# Allegro board codec_board_newcaps.brd
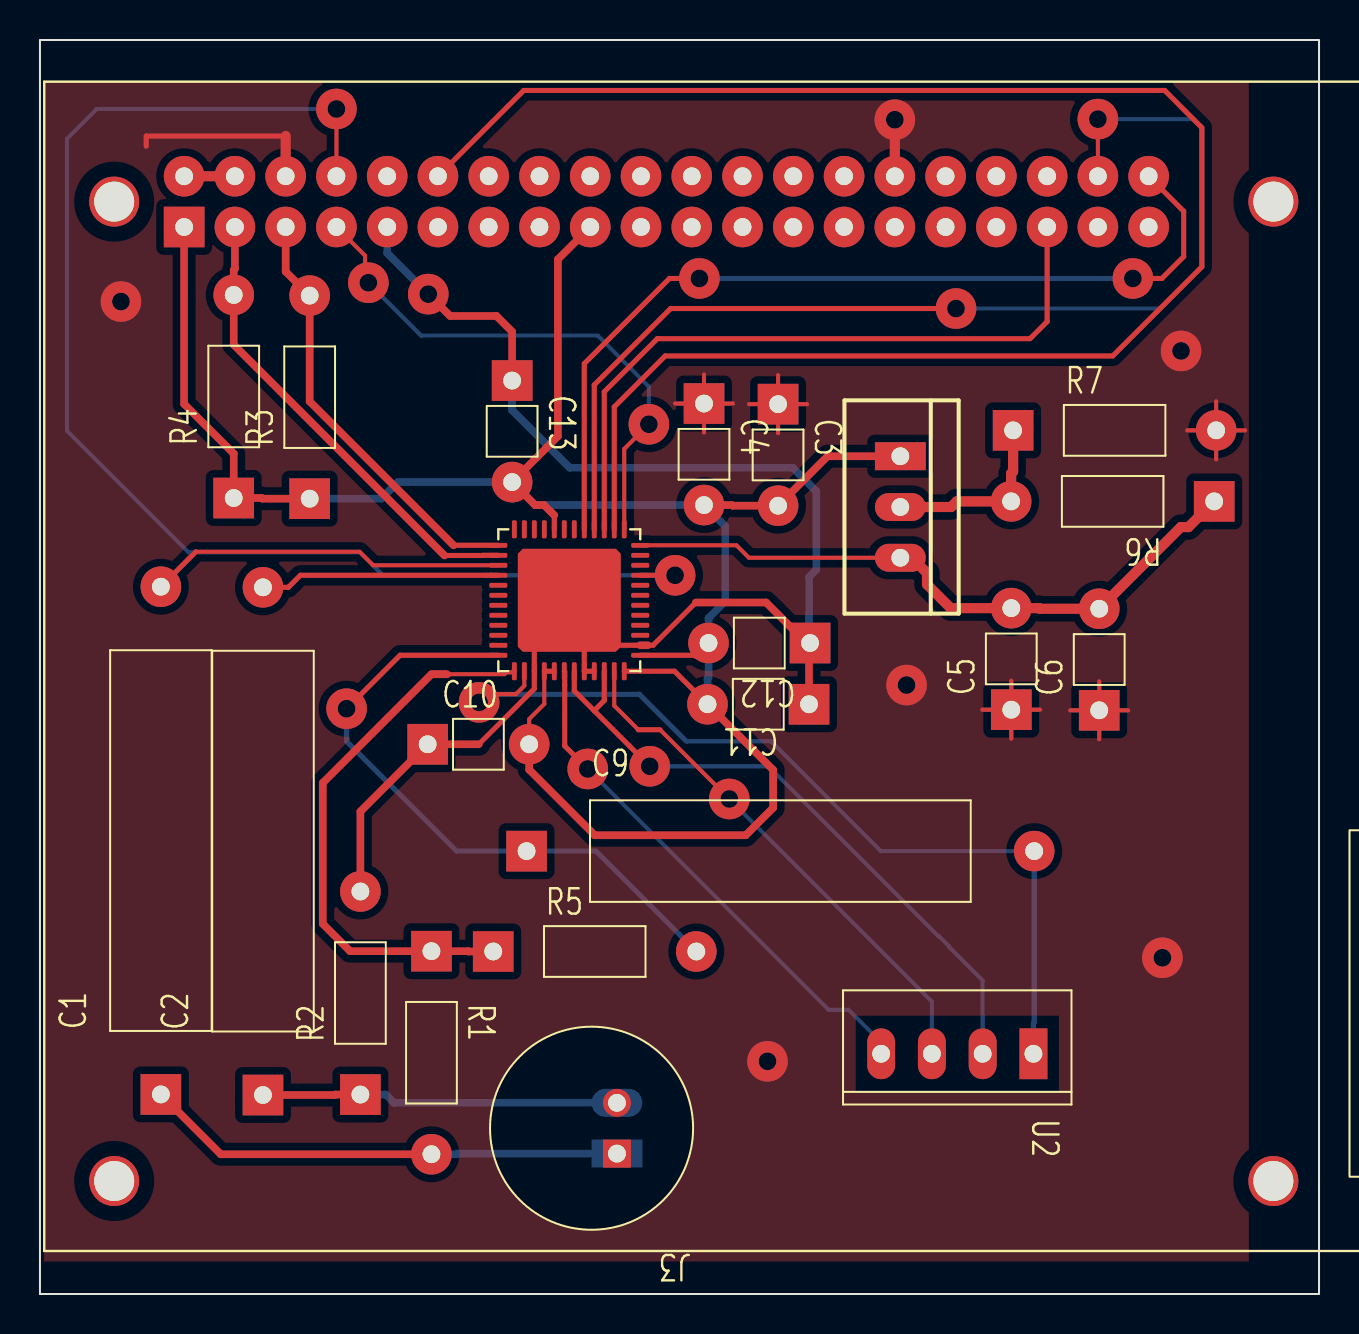
[diagram p0: board, top side]
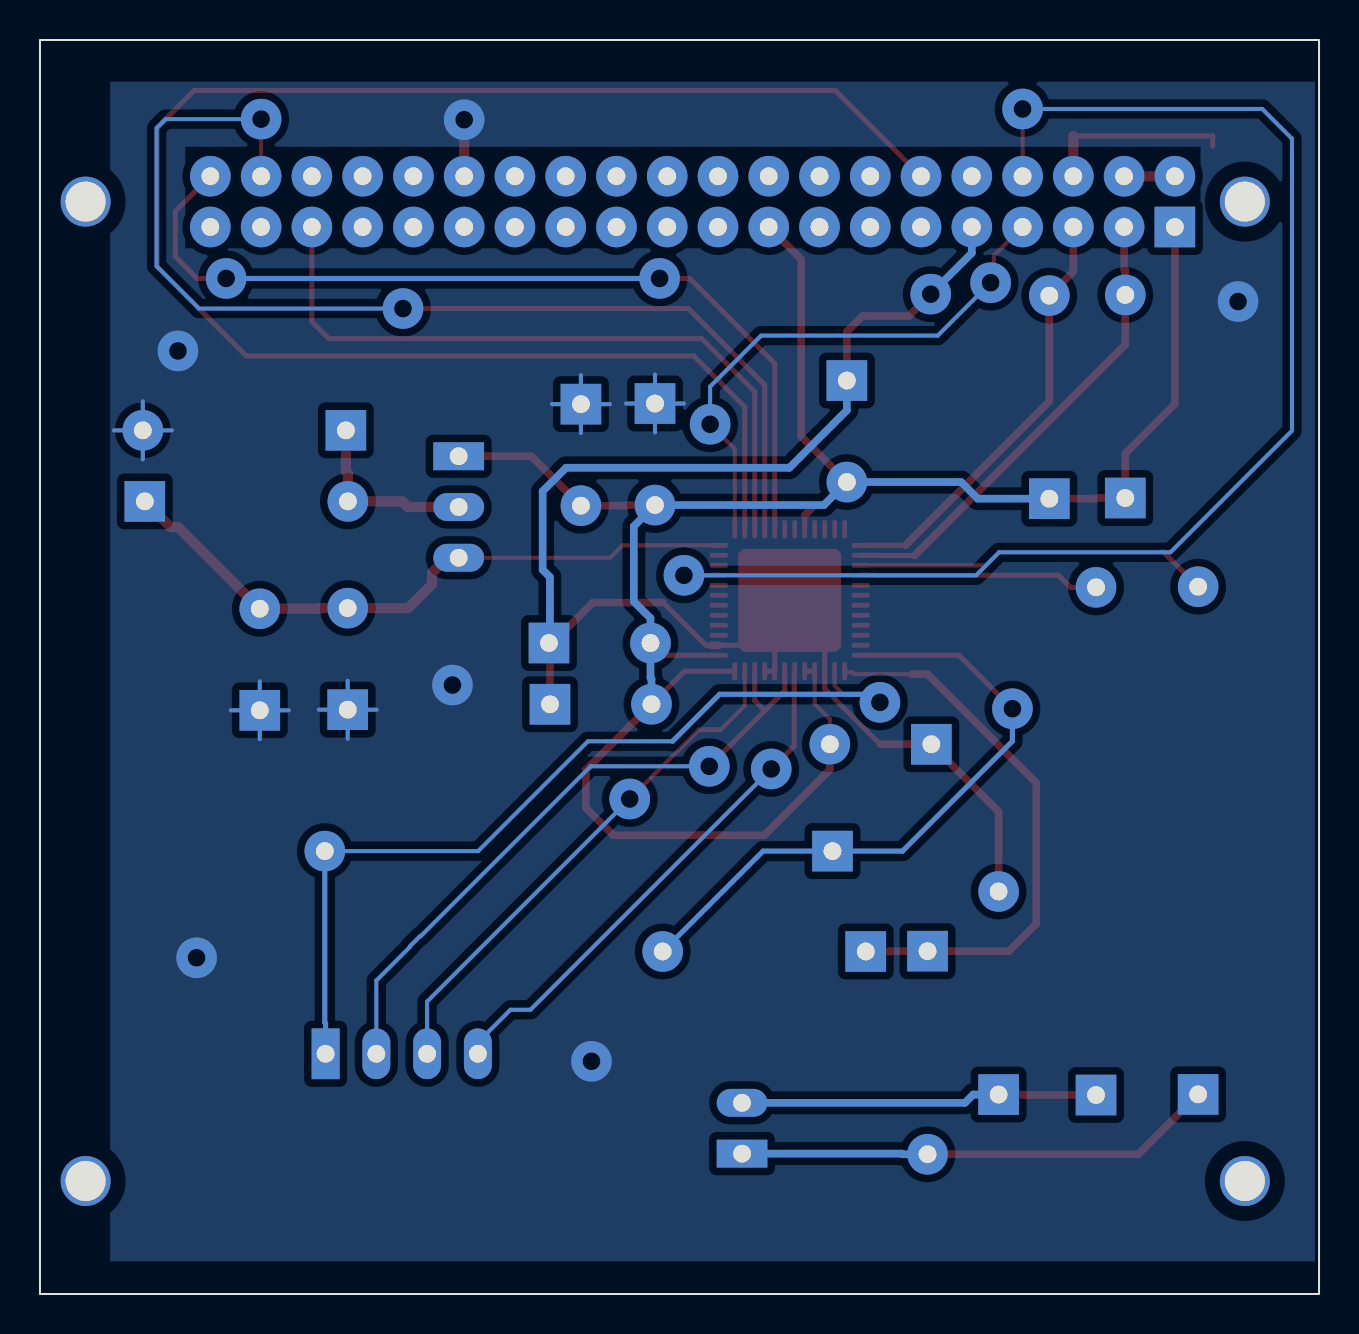
[diagram p1: board, bottom side, seen from below]

Outline 64 x 62.74 mm; copper layers: TOP, BOTTOM. Coordinates in mm from the lower left corner of the outline.
Outline path: rectangle 0,0 64,62.74

## Design rules (mm)
constraint set DEFAULT: min track width 0.203, pair gap 0.203

## Placement (name value [footprint] x y rotation side)
C1  0.47uF  [GU-RC1000]  6.05 9.99 90 top
C2  0.47uF  [GU-RC1000]  11.16 9.96 90 top
C3  1uF  [GU-RC200]  36.93 44.52 270 top
C4  1uF  [GU-RC200]  33.23 44.55 270 top
C5  1uF  [GU-RC200]  48.6 29.24 90 top
C6  1uF  [GU-RC200]  53 29.2 90 top
C9  0.47uF  [GU-RC1000]  24.35 22.16 0 top
C10  1uF  [GU-RC200]  19.4 27.51 0 top
C11  1uF  [GU-RC200]  38.48 29.51 180 top
C12  1uF  [GU-RC200]  38.53 32.57 180 top
C13  1uF  [GU-RC200]  23.62 45.7 270 top
J1  TLV320AIC33  [QFN49P50_700X700X100L40X24T515]  26.48 34.71 270 top
J3  Mic  [GU-MIC100]  28.87 7.03 180 top
R1  1k  [GU-RC400]  19.59 17.15 270 top
R2  1k  [GU-RC400]  16.03 9.98 90 top
R3  10k  [GU-RC400]  13.5 39.79 90 top
R4  10k  [GU-RC400]  9.7 39.82 90 top
R5  2k  [GU-RC400]  22.68 17.14 0 top
R6  1k  [GU-RC400]  58.75 39.66 180 top
R7  1k  [GU-RC400]  48.69 43.21 0 top
U1  Raspberry Pi B+  [GU-RASP-PI-3]  0.21 2.15 0 top
U2  Aux Out  [GU-MOLEX4]  49.71 12.02 270 top
U4  LM317_H  [GU-TO220AB]  43.05 41.92 270 top

## Library data of the parts
C1-C6 C9-C13 = CAP NP
J1 = CON50A_2
J3 = CON2
R1-R7 = RESISTOR
U1 = Raspberry Pi B+_0
U2 = 2MMCONN4
U4 = LM317_H

## Footprints (pads in the part's own frame, mm; a bottom-side part is the same pattern mirrored in y, then rotated)
GU-MIC100
  rect 1.397x1.397 hole 0.889: 1(0,0)
  round 1.397 hole 0.889: 2(0,-2.54)
GU-MOLEX4
  rect 2.54x1.397 hole 0.889: 1(0,0)
  oval 2.54x1.397 hole 0.889: 2(0,-2.54) 3(0,-5.08) 4(0,-7.62)
GU-RASP-PI-3
  round 2.5 hole 2 unplated: (3.5,52.5) (3.5,3.5) (61.5,52.5) (61.5,3.5)
  rect 2.032x2.032 hole 0.889: 1(7,51.23)
  round 2.032 hole 0.889: 2(7,53.77) 3(9.54,51.23) 4(9.54,53.77) 5(12.08,51.23) 6(12.08,53.77) 7(14.62,51.23) 8(14.62,53.77) 9(17.16,51.23) 10(17.16,53.77) 11(19.7,51.23) 12(19.7,53.77) 13(22.24,51.23) 14(22.24,53.77) 15(24.78,51.23) 16(24.78,53.77) 17(27.32,51.23) 18(27.32,53.77) 19(29.86,51.23) 20(29.86,53.77) 21(32.4,51.23) 22(32.4,53.77) 23(34.94,51.23) 24(34.94,53.77) 25(37.48,51.23) 26(37.48,53.77) 27(40.02,51.23) 28(40.02,53.77) 29(42.56,51.23) 30(42.56,53.77) 31(45.1,51.23) 32(45.1,53.77) 33(47.64,51.23) 34(47.64,53.77) 35(50.18,51.23) 36(50.18,53.77) 37(52.72,51.23) 38(52.72,53.77) 39(55.26,51.23) 40(55.26,53.77)
GU-RC200
  rect 2.032x2.032 hole 0.889: 1(0,0)
  round 2.032 hole 0.889: 2(5.08,0)
GU-RC400
  rect 2.032x2.032 hole 0.889: 1(0,0)
  round 2.032 hole 0.889: 2(10.16,0)
GU-RC1000
  rect 2.032x2.032 hole 0.889: 1(0,0)
  round 2.032 hole 0.889: 2(25.4,0)
GU-TO220AB
  rect 1.397x2.54 hole 0.889: 1(0,0)
  oval 1.397x2.54 hole 0.889: 2(2.54,0) 3(5.08,0)
QFN49P50_700X700X100L40X24T515
  rrect 0.24x0.9 smd: 1(-2.75,-3.55) 2(-2.25,-3.55) 3(-1.75,-3.55) 4(-1.25,-3.55) 5(-0.75,-3.55) 6(-0.25,-3.55) 7(0.25,-3.55) 8(0.75,-3.55) 9(1.25,-3.55) 10(1.75,-3.55) 11(2.25,-3.55) 12(2.75,-3.55) 25(2.75,3.55) 26(2.25,3.55) 27(1.75,3.55) 28(1.25,3.55) 29(0.75,3.55) 30(0.25,3.55) 31(-0.25,3.55) 32(-0.75,3.55) 33(-1.25,3.55) 34(-1.75,3.55) 35(-2.25,3.55) 36(-2.75,3.55)
  rrect 0.9x0.24 smd: 13(3.55,-2.75) 14(3.55,-2.25) 15(3.55,-1.75) 16(3.55,-1.25) 17(3.55,-0.75) 18(3.55,-0.25) 19(3.55,0.25) 20(3.55,0.75) 21(3.55,1.25) 22(3.55,1.75) 23(3.55,2.25) 24(3.55,2.75) 37(-3.55,2.75) 38(-3.55,2.25) 39(-3.55,1.75) 40(-3.55,1.25) 41(-3.55,0.75) 42(-3.55,0.25) 43(-3.55,-0.25) 44(-3.55,-0.75) 45(-3.55,-1.25) 46(-3.55,-1.75) 47(-3.55,-2.25) 48(-3.55,-2.75)
  rrect 5.15x5.15 smd: 49(0,0)

## Nets
1.9V: C5.2 C6.2 J1.36 R6.1 U4.3(OUT)
3V3: C3.2 C4.2 C10.2 C11.2 C12.2 C13.2 J1.16 J1.17 J1.24 J1.25 J1.44 R3.1 R4.1 U1.1 U1.17 U4.1
5V: U1.2 U1.4(P5V#4)
AGND: C10.1 C11.1 C12.1 C13.1 J1.15 J1.20 J1.21 J1.26 J1.49 R2.2 U1.9 U1.25 U1.34 U1.39
DGND: C3.1 C4.1 C5.1 C6.1 J1.42 J1.43 R7.2 U1.6 U1.14 U1.20 U1.30
/RESET: J1.33 U1.8
BCLK: J1.38 U1.12
DIN: J1.40 U1.38
DOUT: J1.41 U1.40
HPCOM: J1.19 J1.22 U2.2
HPLOUT: J1.18 U2.4
HPROUT: J1.23 U2.3
LINE1LM: C2.2 J1.4
LINE1LP: C1.2 J1.3
MCLK: J1.37 U1.7
MIC3R: C9.2 J1.14 U2.1
MICBIAS: J1.13 R1.1 R5.1
MICDET: C9.1 J1.12 R5.2
SCL: J1.1 R3.2 U1.5
SDA: J1.2 R4.2 U1.3
WCLK: J1.39 U1.35
N00434: C1.1 J3.1 R1.2
N00441: C2.1 J3.2 R2.1
N13170: R6.2 R7.1 U4.2

Pads without a net: J1 5 6 7 8 9 10 11 27 28 29 30 31 32 34 35 45 46 47 48; U1 10 11 13 15 16 18 19 21 22 23 24 26 27 28 29 31 32 33 36 37

## Via types
v1: diameter 2.032, hole 0.889, TOP to BOTTOM, 20 vias

## Routing (per net, layer and track width the routed paths; a pad name or vN(x,y) marks a point on that pad's centre or on a via; arc(x,y) is an arc through that point)
1.9V: length 32.6
  TOP w0.203: U4.3 35.47,36.84 34.85,37.46 J1.36
  TOP w0.508: R6.1 57.47,38.37 57.09,38.37 C6.2 50.03,34.28 50,34.32 C5.2 45.57,34.32 44.38,35.5 44.38,36.07 43.62,36.84 U4.3
3V3: length 113.4
  TOP w0.203: J1.16 25.23,29.52 24.48,28.77 C10.2
  TOP w0.254: C11.2 31.75,31.16 J1.24 ; J1.25 32.84,31.96 ; J1.17 J1.16 ; J1.44 25.73,38.96
  TOP w0.381: C11.2 36.69,26.22 36.69,24.33 35.31,22.95 27.76,22.95 24.48,26.24 C10.2 ; 25.73,38.96 25.22,39.47 24.78,39.47 C13.2 25.91,42.91 25.91,51.76 U1.17 ; U1.1 7.21,44.53 9.7,42.05 R4.1 11.09,39.82 11.13,39.79 R3.1 ; C4.2 34.62,39.47 34.65,39.44 C3.2 39.41,41.92 U4.1 ; 32.84,31.96 C12.2
  BOTTOM w0.381: R3.1 17.07,39.79 17.9,40.62 C13.2 24.78,39.47 C4.2 34.28,38.41 34.28,34.65 33.45,33.82 C12.2 33.45,30.83 33.4,30.78 C11.2
5V: length 2.5
  TOP w0.508: U1.2 U1.4
AGND: length 79.2
  TOP w0.254: 27.23,33.96 J1.20 J1.21 ; 24.73,32.96 J1.15 24.73,30.28 21.96,27.51 ; 32.81,34.59 30.68,32.46 30.41,32.46 ; J1.26 28.73,32.46
  TOP w0.381: C12.1 38.44,32.48 ; 38.44,32.48 36.33,34.59 32.81,34.59 ; 38.44,32.48 38.48,32.45 C11.1 ; 21.96,27.51 C10.1 16.03,24.14 R2.2 ; v1(19.43,50.03) 20.52,48.93 22.84,48.93 23.62,48.15 C13.1 ; 28.73,32.46 J1.49 24.73,32.96 ; J1.26 30.41,32.46
  BOTTOM w0.381: U1.9 17.37,52.08 v1(19.43,50.03) ; C12.1 38.48,32.62 38.48,35.87 38.85,36.24 38.85,40.17 37.67,41.34 26.5,41.34 23.62,44.21 C13.1
DGND: length 70.3
  TOP w0.203: 53,27.76 C6.1 ; C6.1 51.55,29.2 ; C6.1 53,30.65 ; C6.1 54.45,29.2 ; 58.85,41.76 R7.2 ; R7.2 58.85,44.66 ; R7.2 60.3,43.21 ; R7.2 57.4,43.21 ; C3.1 38.38,44.52 ; C3.1 36.93,43.07 ; C3.1 36.93,45.97 ; C3.1 35.48,44.52 ; 31.78,44.55 C4.1 ; C4.1 34.67,44.55 ; C4.1 33.23,43.1 ; C4.1 33.23,46 ; 48.6,27.79 C5.1 ; C5.1 48.6,30.68 ; C5.1 50.05,29.24 ; C5.1 47.15,29.24
  TOP w0.254: 5.32,57.42 5.32,57.93 12.29,57.93 ; v1(42.77,58.75) 42.85,58.75
  TOP w0.508: U1.6 12.29,57.93 ; U1.30 v1(42.77,58.75)
  BOTTOM w0.203: C3.1 38.38,44.52 ; C3.1 36.93,43.07 ; C3.1 36.93,45.97 ; C3.1 35.48,44.52 ; 48.6,27.79 C5.1 ; C5.1 47.15,29.24 ; C5.1 48.6,30.68 ; C5.1 50.05,29.24 ; C6.1 54.45,29.2 ; C6.1 53,27.76 ; C6.1 51.55,29.2 ; C6.1 53,30.65 ; 31.78,44.55 C4.1 ; C4.1 33.23,46 ; C4.1 33.23,43.1 ; C4.1 34.67,44.55 ; R7.2 58.85,44.66 ; R7.2 58.85,41.76 ; R7.2 57.4,43.21 ; R7.2 60.3,43.21
  vias: v1(4.05,49.65) v1(36.4,11.64) v1(43.36,30.47) v1(56.16,16.82) v1(57.09,47.18)
/RESET: length 67.2
  TOP w0.203: v1(14.83,59.29) U1.8
  TOP w0.254: J1.33 v1(31.78,35.96)
  BOTTOM w0.203: v1(31.78,35.96) 17.16,35.96 16.01,37.11 7.43,37.11 1.35,43.19 1.35,57.8 2.84,59.29 v1(14.83,59.29)
BCLK: length 86.2
  TOP w0.254: U1.12 24.21,60.22 56.28,60.22 58.13,58.36 58.13,51.39 53.68,46.93 31.29,46.93 28.73,44.38 J1.38
DIN: length 55.3
  TOP w0.203: v1(52.93,58.78) U1.38
  TOP w0.254: J1.40 27.73,45.48 31.55,49.3 v1(45.83,49.3)
  BOTTOM w0.203: v1(45.83,49.3) 56.04,49.3 58.16,51.43 58.16,58.32 57.71,58.78 v1(52.93,58.78)
DOUT: length 45.2
  TOP w0.254: U1.40 57.23,54.17 57.23,51.9 56.13,50.81 v1(54.68,50.81) ; v1(32.99,50.81) 31.5,50.81 27.23,46.55 J1.41
  BOTTOM w0.254: v1(32.99,50.81) v1(54.68,50.81)
HPCOM: length 33.3
  TOP w0.254: 27.73,29.18 28.23,29.69 J1.22 ; 27.73,29.18 v1(30.51,26.4) ; 27.73,29.18 26.73,30.18 J1.19
  BOTTOM w0.203: v1(30.51,26.4) 36.45,26.4 44.95,17.9 44.99,17.9 45.49,17.39 45.49,17.36 47.17,15.68 U2.2
HPLOUT: length 26.3
  TOP w0.254: v1(27.41,26.27) 26.26,27.42 26.26,30.46 26.26,30.92 26.26,31.14 J1.18
  BOTTOM w0.203: v1(27.41,26.27) 39.46,14.22 40.46,14.22 42.09,12.59 U2.4
HPROUT: length 26.4
  TOP w0.203: J1.23 28.73,29.44 29.94,28.23 ; v1(34.49,24.77) 31.03,28.23
  TOP w0.254: 31.03,28.23 29.94,28.23
  BOTTOM w0.203: v1(34.49,24.77) 44.63,14.63 U2.3
LINE1LM: length 12
  TOP w0.254: C2.2 12.43,35.36 13.03,35.96 22.33,35.96 22.56,35.96 J1.4
LINE1LP: length 17.9
  TOP w0.203: 7.8,37.13 16,37.13 16.67,36.46 J1.3
  TOP w0.254: 7.8,37.13 C1.2
MCLK: length 27.3
  TOP w0.203: U1.7 16.27,51.95 16.27,50.76 v1(16.43,50.6) ; J1.37 29.23,42.28 v1(30.47,43.52)
  BOTTOM w0.203: v1(16.43,50.6) 19.08,47.95 27.92,47.95 30.47,45.4 v1(30.47,43.52)
MIC3R: length 44.7
  TOP w0.203: J1.14 24.23,30.43 23.82,30.01 22.38,30.01 v1(21.97,29.6)
  BOTTOM w0.203: C9.2 42.08,22.16 36.58,27.65 32.35,27.65
  BOTTOM w0.254: 32.35,27.65 29.99,30.01 22.37,30.01 v1(21.97,29.6) ; C9.2 49.75,13.58 49.71,13.54 U2.1
MICBIAS: length 28.7
  TOP w0.203: 23.71,31.16 23.65,31.1 23.33,31.1 23.25,31.01 20.37,31.01
  TOP w0.254: 19.72,31.07 20.31,31.07 20.37,31.01 ; 23.71,31.16 J1.13
  TOP w0.381: 20.37,31.01 19.58,31.01 14.15,25.57 14.15,18.52 15.52,17.15 R1.1 21.42,17.15 21.44,17.14 R5.1
MICDET: length 32.5
  TOP w0.254: J1.12 18.02,31.96 v1(15.34,29.28)
  BOTTOM w0.254: R5.2 27.82,22.16 C9.1 ; C9.1 20.84,22.16 15.34,27.66 v1(15.34,29.28) ; C9.1 24.12,21.93
SCL: length 21.6
  TOP w0.254: J1.1 20.69,37.46
  TOP w0.381: 20.69,37.46 13.5,44.66 R3.2 12.29,51.15 U1.5
SDA: length 23.5
  TOP w0.254: J1.2 22.18,36.96 22.17,36.95 20.24,36.95
  TOP w0.381: U1.3 9.75,51.29 9.7,51.23 R4.2 9.7,47.5 20.24,36.95
WCLK: length 35.2
  TOP w0.254: U1.35 50.39,48.65 49.54,47.8 30.89,47.8 28.23,45.14 J1.39
N00434: length 24.1
  TOP w0.381: C1.1 9.04,6.99 R1.2
  BOTTOM w0.381: J3.1 20.89,7.03 20.86,6.99 R1.2
N00441: length 17.9
  TOP w0.381: R2.1 14.76,9.98 14.74,9.96 C2.1
  BOTTOM w0.381: R2.1 17.3,9.98 17.72,9.57 J3.2
N13170: length 9.3
  TOP w0.508: U4.2 45.59,39.38 45.87,39.66 R6.2 48.59,41.05 48.69,41.15 R7.1

## Copper pours and planes (outline as drawn; the poured copper is in the pictures)
DGND on TOP: 0.2,60.66 60.48,60.66 60.48,1.63 0.2,1.63 ; 33 cut-outs
DGND on BOTTOM: 0.2,60.66 60.48,60.66 60.48,1.63 0.2,1.63
